# EAGLE board freq (EAGLE 4.16)
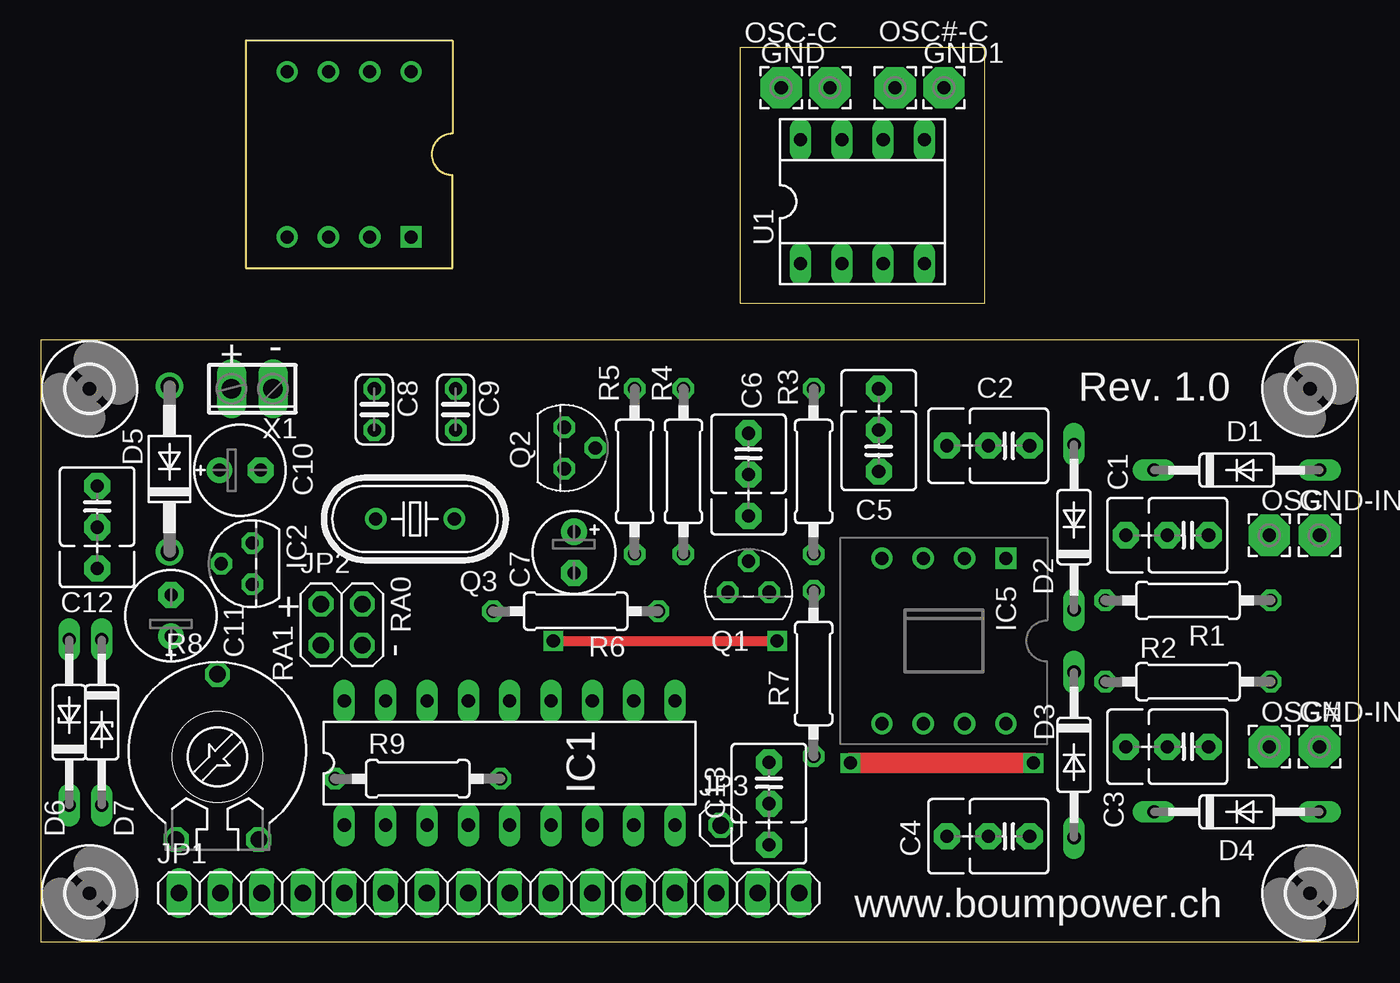
[diagram p0: board, top side]
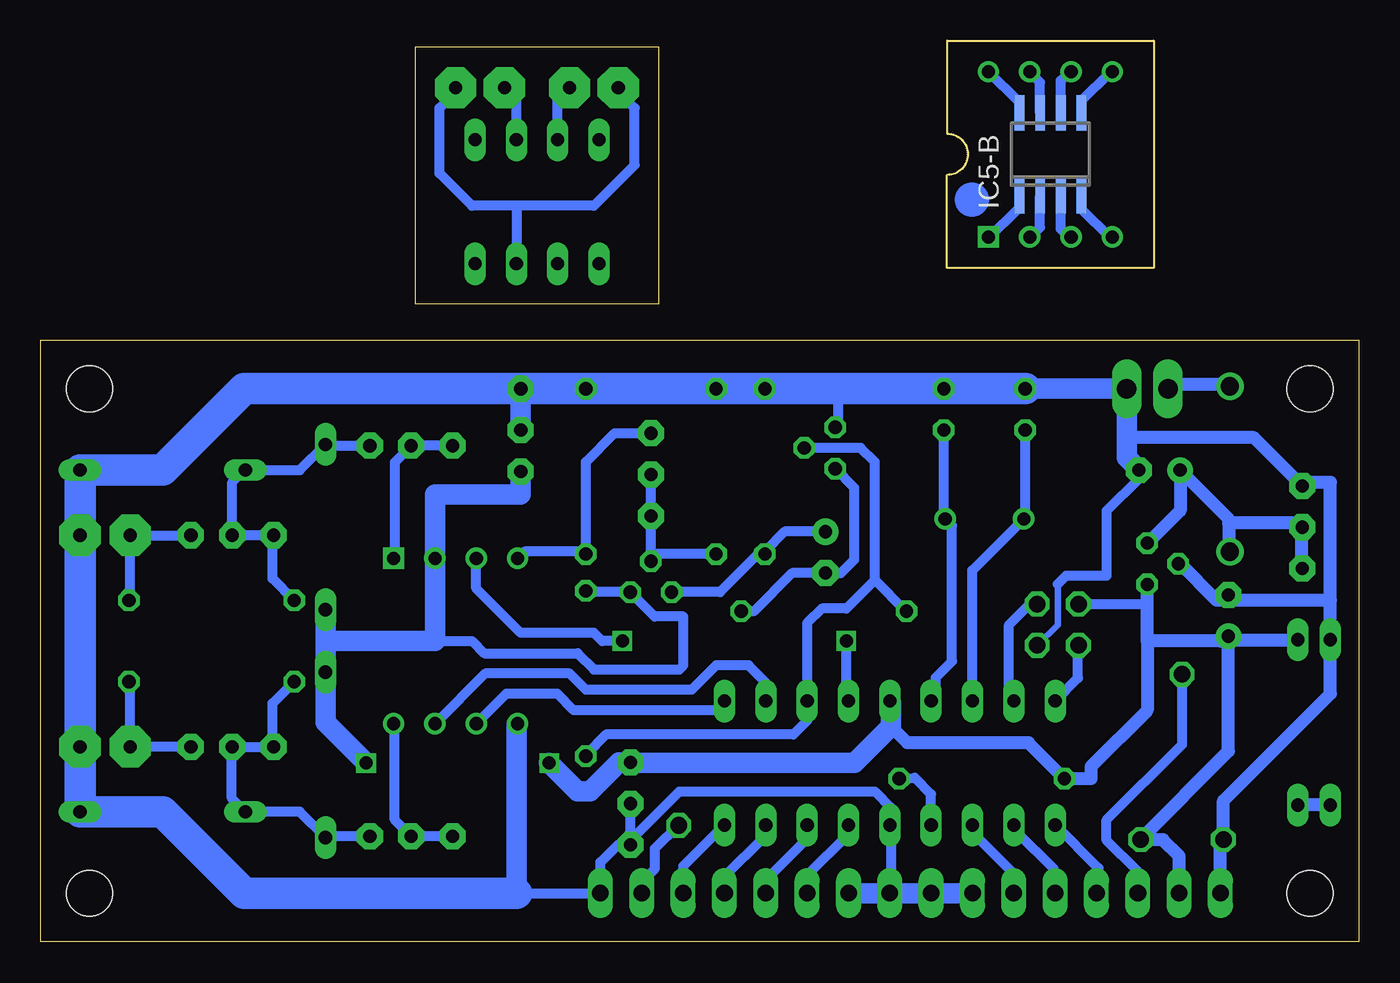
[diagram p1: board, bottom side, seen from below]

Size 81 x 55 mm. Coordinates in mm from the lower left corner, seen from the top.
Outline: 0,0 81,0 81,37 0,37 0,0
Outline: 43,55 58,55 58,39.25 43,39.25 43,55
Copper layers (1*16): Top 0.035mm / dielectric 1.5mm / Bottom 0.035mm
Design rules "Olimex 10mils": minimum track width 10mil, minimum drill 24mil, track to track 10mil, track to pad 10mil, pad to pad 10mil, via to via 10mil, smd to smd 10mil, copper to edge 40mil, drill to drill 10mil, minimum pad ring 10mil, minimum via ring 8mil, stop-mask expansion 0mil, vias tented up to drill 0mil, thermal gap 10mil

## Footprints (pad centres in the part's own frame; a part is rotated, then mirrored left to right if it is on the bottom)
C2.5/5-5 = drill 0.813 pad 1.6 octagon: 1 -1.27,0; 2 1.27,0; 3 3.81,0
E2,5-5 = drill 0.813 pad 1.6 round: + -1.27,0 | drill 0.813 pad 1.6 octagon: - 1.27,0
C025-024X044 = drill 0.813 octagon: 1 -1.27,0; 2 1.27,0
E2,5-6E = drill 0.813 pad 1.575 round: + -1.27,0 | drill 0.813 pad 1.575 octagon: - 1.27,0
DO35-10 = drill 0.813 long: A 5.08,0; C -5.08,0
DO41-10 = drill 1.118 round: A 5.08,0; C -5.08,0
DO35Z10 = drill 0.813 long: A 5.08,0; C -5.08,0
2,54/0,8 = drill 0.813 pad 2.54 octagon: 1 0,0
DIL18 = drill 0.813 long: 1 -10.16,-3.81; 2 -7.62,-3.81; 3 -5.08,-3.81; 4 -2.54,-3.81; 5 0,-3.81; 6 2.54,-3.81; 7 5.08,-3.81; 8 7.62,-3.81; 9 10.16,-3.81; 10 10.16,3.81; 11 7.62,3.81; 12 5.08,3.81; 13 2.54,3.81; 14 0,3.81; 15 -2.54,3.81; 16 -5.08,3.81; 17 -7.62,3.81; 18 -10.16,3.81
TO92 = drill 0.813 octagon: 1 -1.27,0; 2 0,1.905; 3 1.27,0
SO08-DIP8W = drill 0.8 square: 1 -3.81,-5.08 | drill 0.8 round: 2 -1.27,-5.08; 3 1.27,-5.08; 4 3.81,-5.08; 5 3.81,5.08; 6 1.27,5.08; 7 -1.27,5.08; 8 -3.81,5.08
ADAPT-SO08 = drill 0.8 square: 1 -3.81,-5.08 | drill 0.8 round: 2 -1.27,-5.08; 3 1.27,-5.08; 4 3.81,-5.08; 5 3.81,5.08; 6 1.27,5.08; 7 -1.27,5.08; 8 -3.81,5.08 | smd 0.6 x 2.2: 9 -1.905,-2.54; 10 -0.635,-2.54; 11 0.635,-2.54; 12 1.905,-2.54; 13 1.905,2.54; 14 0.635,2.54; 15 -0.635,2.54; 16 -1.905,2.54
1X16 = drill 1.016 long: 1 -19.05,0; 2 -16.51,0; 3 -13.97,0; 4 -11.43,0; 5 -8.89,0; 6 -6.35,0; 7 -3.81,0; 8 -1.27,0; 9 1.27,0; 10 3.81,0; 11 6.35,0; 12 8.89,0; 13 11.43,0; 14 13.97,0; 15 16.51,0; 16 19.05,0
2X02 = drill 1.016 octagon: 1 -1.27,-1.27; 2 -1.27,1.27; 3 1.27,-1.27; 4 1.27,1.27
1X01 = drill 1.016 octagon: 1 0,0
TO92' = drill 0.813 octagon: 1 1.27,0; 2 0,1.905; 3 -1.27,0
HC49U70 = drill 0.813 round: 1 -2.413,0; 2 2.413,0
0207/10 = drill 0.813 octagon: 1 -5.08,0; 2 5.08,0
PT-10 = drill 1.016 octagon: A -2.54,-5.08; E 2.54,-5.08; S 0,5.08
SOCKED-08 = drill 0.813 long: 1 -3.81,-3.81; 2 -1.27,-3.81; 3 1.27,-3.81; 4 3.81,-3.81; 5 3.81,3.81; 6 1.27,3.81; 7 -1.27,3.81; 8 -3.81,3.81
2,8 = hole 2.8: 0,0
2POL254 = drill 1.2 long: 1 -1.27,0; 2 1.27,0

## Placement (x,y rotation side)
C1  330pF  [C2.5/5-5]  70.5,25 180 top
C2  1000pF  [C2.5/5-5]  59.5,30.5 180 top
C3  330pF  [C2.5/5-5]  70.5,12 180 top
C4  1000pF  [C2.5/5-5]  59.5,6.5 180 top
C5  0.1uF  [C2.5/5-5]  51.5,30.19 90 top
C6  0.01uF  [C2.5/5-5]  43.5,30 270 top
C7  22uF  [E2,5-5]  32.77,23.95 270 top
C8  27pF  [C025-024X044]  20.5,32.73 270 top
C9  27pF  [C025-024X044]  25.5,32.73 270 top
C10  [E2,5-6E]  12.25,29 0 top
C11  [E2,5-6E]  8.01,20.06 90 top
C12  0.1uF  [C2.5/5-5]  3.47,26.76 270 top
C13  0.1uF  [C2.5/5-5]  44.75,9.77 270 top
D1  1N5711  [DO35-10]  73.5,29 0 top
D2  1N5711  [DO35-10]  63.5,25.5 90 top
D3  1N5711  [DO35-10]  63.5,11.5 270 top
D4  1N5711  [DO35-10]  73.5,8 0 top
D5  1N4001  [DO41-10]  7.92,29.07 90 top
D6  1N5226  [DO35Z10]  3.75,13.5 270 top
D7  1N5226  [DO35Z10]  1.75,13.5 90 top
GND  [2,54/0,8]  45.5,52.5 0 top
GND1  [2,54/0,8]  55.5,52.5 0 top
GND-IN1  [2,54/0,8]  78.58,25 0 top
GND-IN2  [2,54/0,8]  78.58,12 0 top
IC1  PIC16F88  [DIL18]  28.82,11 0 top
IC2  7805L  [TO92]  13,23.25 90 top
IC5  [SO08-DIP8W]  55.5,18.5 180 top
IC5-B  MC12080  [ADAPT-SO08]  18.95,48.41 0 bottom
JP1  [1X16]  27.55,3 0 top
JP2  [2X02]  18.5,19.5 0 top
JP3  [1X01]  41.79,7.17 0 top
OSC  [2,54/0,8]  75.5,25 0 top
OSC#  [2,54/0,8]  75.5,12 0 top
OSC#-C  [2,54/0,8]  52.5,52.5 0 top
OSC-C  [2,54/0,8]  48.5,52.5 0 top
Q1  2N5485  [TO92']  43.5,21.5 0 top
Q2  2N3663  [TO92']  32.17,30.36 270 top
Q3  20MHz  [HC49U70]  23,26 180 top
R1  47  [0207/10]  70.5,21 180 top
R2  47  [0207/10]  70.5,16 180 top
R3  1K  [0207/10]  47.5,28.92 270 top
R4  1M  [0207/10]  39.5,28.92 270 top
R5  1K  [0207/10]  36.5,28.92 270 top
R6  15K  [0207/10]  32.88,20.33 180 top
R7  1K  [0207/10]  47.5,16.5 90 top
R8  [PT-10]  10.86,11.37 0 top
R9  10K  [0207/10]  23.17,10.04 0 top
U1  SA602  [SOCKED-08]  50.5,45.5 0 top
U$1  [2,8]  3,3 0 top
U$2  [2,8]  3,34 0 top
U$3  [2,8]  78,34 0 top
U$4  [2,8]  78,3 0 top
X1  [2POL254]  13,34 180 top

## Library data of the parts
C1-C6 C12 C13 = capacitor-wima
C7-C11 R1-R7 R9 = rcl
D1-D7 = diode
GND GND1 GND-IN1 GND-IN2 OSC OSC# OSC#-C OSC-C = wirepad
IC1 = microchip
IC2 = linear
IC5 = aprs
IC5-B = Adapt-SO
JP1-JP3 = pinhead
Q1 = transistor-fet
Q2 = transistor-npn
Q3 = crystal
R8 = pot
U1 = ic-package
U$1-U$4 = holes
X1 = con-phoenix-254

## Nets
+5V: C5.1 C11.+ C13.1 D2.C D3.C D6.C IC1.14 IC2.1 IC5.2 JP1.2 JP2.2 Q1.1 R7.2 R8.E R9.1
FREQ: IC1.12 Q2.2 R6.2 R7.1
GND: C5.2 C5.3 C8.1 C9.1 C10.- C11.- C12.1 C13.2 C13.3 D1.A D4.A D7.A GND-IN1.1 GND-IN2.1 IC1.5 IC2.2 IC5.5 JP1.1 JP1.7 JP1.8 JP1.9 JP1.10 JP1.16 JP2.3 Q2.3 R3.1 R4.1 R5.1 R8.A X1.1
LCD-DB4: IC1.6 JP1.11
LCD-DB5: IC1.7 JP1.12
LCD-DB6: IC1.8 JP1.13
LCD-DB7: IC1.9 JP1.14
LCD-E: IC1.3 JP1.6
LCD-RS: IC1.1 JP1.4
LCD-RW: IC1.2 JP1.5
N$1: GND1.1 GND.1 U1.3
N$2: OSC-C.1 U1.7
N$3: OSC#-C.1 U1.6
N$4: C1.1 OSC.1 R1.1
N$5: C1.2 C1.3 C2.1 D1.C D2.A R1.2
N$6: C3.1 OSC#.1 R2.1
N$7: C3.2 C3.3 C4.1 D3.A D4.C R2.2
N$8: C2.2 C2.3 IC5.1
N$9: C4.2 C4.3 IC5.8
N$10: JP1.3 R8.S
N$11: C8.2 IC1.16 Q3.2
N$12: C6.1 IC5.4 R3.2
N$13: C6.2 C6.3 Q1.2 R4.2
N$14: C7.+ Q1.3 R5.2
N$15: C7.- Q2.1 R6.1
N$16: C9.2 IC1.15 Q3.1
N$17: IC1.4 R9.2
N$18: JP1.15 JP3.1
N$20: C10.+ C12.2 C12.3 D5.C IC2.3
N$21: D6.A D7.C
N$22: D5.A X1.2
N$23: IC5-B.1 IC5-B.9
N$24: IC5-B.2 IC5-B.10
N$25: IC5-B.3 IC5-B.11
N$26: IC5-B.4 IC5-B.12
N$27: IC5-B.5 IC5-B.13
N$28: IC5-B.6 IC5-B.14
N$29: IC5-B.7 IC5-B.15
N$30: IC5-B.8 IC5-B.16
RA0: IC1.17 JP2.4
RA1: IC1.18 JP2.1
SW1: IC1.13 IC5.3
SW2: IC1.10 IC5.6
SW3: IC1.11 IC5.7

## Tracks (layer width: path | path; a pad name or v marks a point on that pad's centre or on a via)
+5V  (via drill 0.8)
  Top 1.27: v49.75,11 v61,11
  Bottom 0.61: R7.2 47.5,21.5 Q1.1 43.27,20 41.5,20 41.5,17 41.75,16.75 47,16.75 48,17.75 53.75,17.75 54.5,18.5 56.77,18.5 | 13,22 13,20.77 | JP2.2 17.21,20.75 13,20.75
  Bottom 0.813: 8.01,18.99 8,19 | 8.01,18.99 C11.+ | D6.C 7.58,18.58 8,19 | JP1.2 11.04,5.29 12.04,6.29 R8.E 13.46,6.29 | 13.46,6.29 13.5,6.25 | 8.01,18.99 8.01,11.74 13.46,6.29 | 8,19 8.5,18.5 13,18.5 | 13,22 IC2.1 13,20.75 13,18.5 | 13,18.5 13,14.25 16.46,10.79 16.46,10.04 R9.1 20.3,12.25 27.75,12.25 28.75,13.25
  Bottom 1.27: 63.5,18.5 D2.C | 63.5,18.5 D3.C 63.5,13.5 v61,11 | 63.5,18.5 56.77,18.5 IC5.2 56.77,27.5 51.5,27.5 C5.1 | IC1.14 28.75,14.74 28.75,13.25 31,11 44.75,11 C13.1 45.46,11.04 47.25,9.25 48,9.25 v49.75,11
FREQ
  Bottom 0.61: R7.1 47.5,11.5 46.25,12.75 34.75,12.75 33.9,13.6 IC1.12 33.9,19.6 33,20.5 31.5,20.5 29.75,22.25 | Q2.2 30.61,30.36 29.75,29.5 29.75,22.25 | 27.8,20.3 27.75,20.25 | R6.2 27.8,20.3 | 27.8,20.3 29.75,22.25
GND
  Bottom 0.406: 18.5,22 18.5,19.5 JP2.3
  Bottom 0.61: Q2.3 32,31.8 32,34 | 28.75,3 28.75,7.12 IC1.5 28.75,7.26 28.75,8.25 29.75,9.25 41.75,9.25 44.75,6.25 C13.3 | JP1.16 46.5,3 | 51.75,3 JP1.16 | C13.3 45.54,5.96 46.6,4.9 JP1.16 | C13.2 C13.3 | 13.5,29 13.5,28.5 15.5,26.5 15.5,22.5 18,22.5 18.5,22
  Bottom 0.813: JP1.1 8.5,6 8.25,6.25 8.29,6.29 R8.A 8.32,8.68 1.75,15.25 D7.A 1.75,21 | IC2.2 11,23.25 8.75,21 8,21 C11.- 8.01,21.49 7.52,21 1.75,21 | 14.27,31 6.44,31 C12.1 3.25,28.25 1.75,28.25 1.75,21
  Bottom 1.27: C5.3 C5.2 | JP1.10 JP1.9 28.75,3 JP1.8 JP1.7 | IC5.5 51.75,13.36 51.75,3 | C8.1 X1.1 14.27,31 14.27,29.77 13.5,29 C10.-
  Bottom 1.93: 51.75,3 68.5,3 73.5,8 D4.A 78.58,11.92 78.5,12 GND-IN2.1 78.58,24.92 78.5,25 GND-IN1.1 78.58,28.92 78.5,29 | 78.5,29 D1.A | 78.5,29 73.5,29 68.5,34 C5.3 | C5.3 R3.1 | C5.3 R4.1 R5.1 32,34 C9.1 C8.1
LCD-DB4
  Bottom 0.61: IC1.6 31.5,7.05 31.5,6.5 33.75,4.25 33.75,3 JP1.11
LCD-DB5
  Bottom 0.61: IC1.7 34,7.09 34,6.25 36.5,3.75 36.5,3 JP1.12
LCD-DB6
  Bottom 0.61: IC1.8 36.5,7.13 36.5,6.5 39,4 39,3 JP1.13
LCD-DB7
  Bottom 0.61: JP1.14 41.5,3 41.5,4.67 IC1.9
LCD-E
  Bottom 0.61: IC1.3 23.5,6.95 23.5,6.5 21.25,4.25 21.25,3 JP1.6
LCD-RS
  Bottom 0.61: JP1.4 16,3 16,4.53 IC1.1
LCD-RW
  Bottom 0.61: IC1.2 21,6.99 21,6.75 18.75,4.5 18.75,3 JP1.5
N$1
  Bottom 0.61: GND1.1 55.5,52.25 56.5,51.25 56.5,47.25 54.5,45.25 51.75,45.25 | GND.1 45.5,52.25 44.5,51.25 44.5,47.75 47,45.25 51.75,45.25 | U1.3 51.77,45.23 51.75,45.25
N$2
  Bottom 0.61: U1.7 49.23,51.77 OSC-C.1
N$3
  Bottom 0.61: U1.6 51.77,51.77 OSC#-C.1
N$4
  Bottom 0.61: C1.1 OSC.1 75.5,21.08 R1.1
N$5
  Bottom 0.61: C2.1 63.5,30.5 D2.A 65.08,29 D1.C 68.5,29 69.23,28.27 C1.2 | C1.2 69.25,25 | 66.75,25 C1.2 | 66.75,25 C1.3 | R1.2 66.75,22.33 66.75,25
N$6
  Bottom 0.61: OSC#.1 75.75,12 | C3.1 OSC#.1 | R2.1 75.5,15.92 OSC#.1
N$7
  Bottom 0.61: R2.2 66.75,14.67 66.75,12 C3.3 C3.2 69.25,12 69.25,8.83 D4.C | D4.C 68.5,8 | D4.C 65.08,8 D3.A 63.42,6.5 C4.1 60.5,6.5
N$8
  Bottom 0.61: C2.2 58.25,30.5 | C2.3 C2.2 | 59.25,23.52 59.25,23.5 | 59.25,23.52 IC5.1 | C2.2 59.25,29.48 59.25,23.52
N$9
  Bottom 0.61: C4.2 58.25,6.5 | C4.3 C4.2 | 59.25,13.48 59.25,13.5 | 59.25,13.48 IC5.8 | C4.2 59.25,7.52 59.25,13.48
N$10
  Bottom 0.61: R8.S 10.86,12.14 15.5,7.5 15.5,6.25 13.58,4.33 JP1.3
N$11
  Bottom 0.61: IC1.16 23.75,14.75 | IC1.16 | IC1.16 23.75,22.84 Q3.2 20.5,26 C8.2
N$12
  Bottom 0.61: R3.2 47.5,24 | IC5.4 51.27,24 47.5,24 | 47.5,24 47.5,29.5 45.73,31.27 C6.1
N$13
  Bottom 0.61: C6.3 43.5,26 | C6.3 C6.2 | 43.5,23.5 C6.3 | 43.5,23.5 Q1.2 | R4.2 43.16,23.84 43.5,23.5
N$14
  Bottom 0.61: C7.+ 35.28,25.22 36.5,24 R5.2 36.91,23.84 39.25,21.5 Q1.3
N$15
  Bottom 0.61: Q2.1 31,27.92 31,23.5 31.82,22.68 C7.- 34.82,22.68 37.17,20.33 R6.1
N$16
  Bottom 0.61: IC1.15 26,15.09 26,16.25 25,17.25 25,25.59 Q3.1 25.5,26 C9.2
N$17
  Bottom 0.61: 27.25,10.06 27.29,10.1 | 27.25,10.06 R9.2 | IC1.4 26.28,9.09 27.25,10.06
N$18
  Bottom 0.61: JP1.15 44.06,3.69 43.25,4.5 43.25,5.75 41.79,7.21 | 41.75,7.25 41.79,7.21 | 41.79,7.21 JP3.1
N$20
  Bottom 0.813: 7.99,23.99 8,24 | 7.99,23.99 D5.C | 11,29 10.98,28.98 | 11,29 C10.+ 10.98,26.52 13,24.5 IC2.3 | 7.99,25.75 7.99,23.99 | 7.99,25.75 7.99,25.99 11,29 | C12.3 3.5,22.98 3.5,25.46 C12.2 3.73,25.75 7.99,25.75
N$21
  Bottom 0.813: D6.A 3.67,8.42 3.5,8.25 3.33,8.42 D7.C
N$22
  Bottom 0.813: 7.82,34.25 7.75,34.25 | D5.A 7.82,34.25 | X1.2 11.48,34.25 7.82,34.25
N$23
  Bottom 0.6: IC5-B.1 22.76,43.26 22.75,43.25 20.86,45.15 IC5-B.9
N$24
  Bottom 0.6: 20.22,43.28 20.25,43.25 | IC5-B.2 20.22,43.28 | IC5-B.10 19.59,43.91 20.22,43.28
N$25
  Bottom 0.6: IC5-B.3 17.75,43.25 18.32,43.81 IC5-B.11
N$26
  Bottom 0.6: IC5-B.4 15.17,43.33 15.25,43.25 17.05,45.05 IC5-B.12
N$27
  Bottom 0.6: IC5-B.5 15.24,53.49 15.25,53.5 17.05,51.7 IC5-B.13
N$28
  Bottom 0.6: IC5-B.6 17.74,53.49 17.75,53.5 18.32,52.94 IC5-B.14
N$29
  Bottom 0.6: 20.24,53.49 20.25,53.5 | 20.24,53.49 IC5-B.7 | IC5-B.15 19.59,52.84 20.24,53.49
N$30
  Bottom 0.6: IC5-B.8 20.86,51.6 IC5-B.16
RA0
  Bottom 0.61: IC1.17 21.5,15.11 21.5,19.5 20.25,20.75 19.75,20.75 JP2.4
RA1
  Bottom 0.61: JP2.1 17.25,18.25 17.25,16.22 IC1.18
SW1  (via drill 0.8)
  Top 0.61: v31.5,18.5 v45.25,18.5
  Bottom 0.61: IC5.3 54.23,21.73 51.5,19 47,19 46.5,18.5 v45.25,18.5 | IC1.13 31.5,14.95 v31.5,18.5
SW2
  Bottom 0.61: 54.25,13.4 54.25,13.25 | 54.25,13.4 IC5.6 52.4,15.25 49.25,15.25 48.25,14.25 39.54,14.25 IC1.10 | 54.25,13.4 54.25,13.75
SW3
  Bottom 0.61: IC1.11 36.38,14.75 36.25,14.75 36.25,15.75 37.5,17 39.5,17 41,15.5 47.5,15.5 48.5,16.5 53.69,16.5 IC5.7

## Text on the board
tNames: + | - | Rev. 1.0 | + | RA0 | - | RA1 | www.boumpower.ch